# EAGLE board Z_Probing_Add_on_Board (EAGLE 7.2.0)
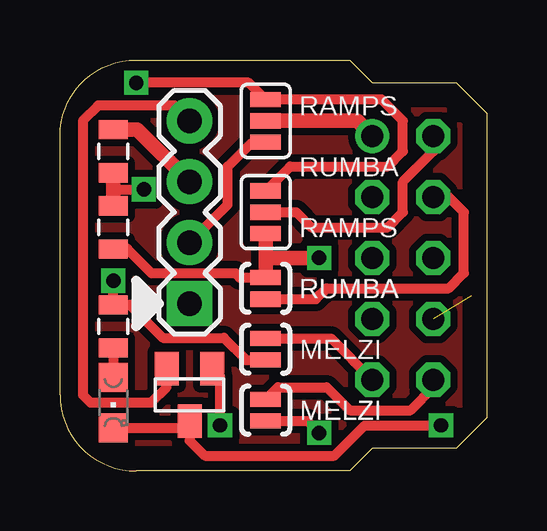
[diagram p0: board, top side]
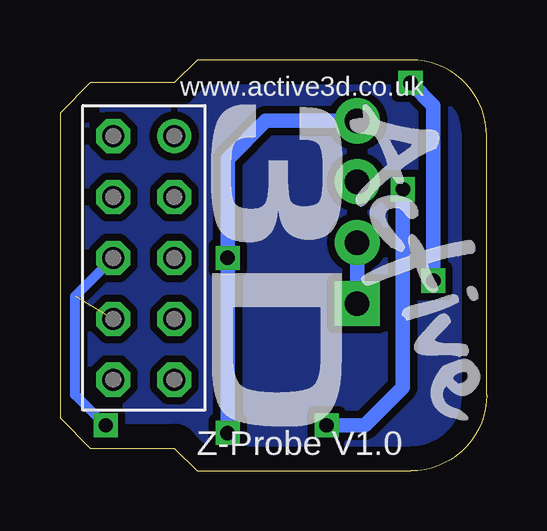
[diagram p1: board, bottom side, seen from below]

Size 17.78 x 17.14 mm. Coordinates in mm from the lower left corner, seen from the top.
Outline: 17.78,14.92 17.78,2.22 16.51,0.95 13.02,0.95 12.07,0 3.18,0 arc-90 0,3.18 0,13.97 arc-90 3.18,17.15 12.07,17.15 13.02,16.19 16.51,16.19 17.78,14.92
Copper layers (1*16): Top 0.035mm / dielectric 1.5mm / Bottom 0.035mm
Design rules "default": minimum track width 10mil, minimum drill 24mil, track to track 8mil, track to pad 8mil, pad to pad 8mil, via to via 8mil, smd to smd 8mil, copper to edge 40mil, drill to drill 8mil, minimum pad ring 10mil, minimum via ring 8mil, stop-mask expansion 4mil, vias tented up to drill 0mil, thermal gap 10mil

## Footprints (pad centres in the part's own frame; a part is rotated, then mirrored left to right if it is on the bottom)
CHIPLED_0805 = smd 1.2 x 1.2: A 0,-1.05; C 0,1.05
SJ_2S-NO = smd 0.635 x 1.27: 1 -0.45,0; 2 0.45,0
SOT23 = smd 1 x 1.4: 1 -0.95,-1.1; 2 0.95,-1.1; 3 0,1.1
0805 = smd 0.8 x 1.2: 1 -0.9,0; 2 0.9,0
1X04 = drill 1.016 pad 1.88 square: 1 0,0 | drill 1.016 pad 1.88: 2 2.54,0; 3 5.08,0; 4 7.62,0
SJ_3 = smd 0.635 x 1.27: 1 -0.889,0; 2 0,0; 3 0.889,0
FE05-2 = drill 0.914: 1 -5.08,1.27 | drill 0.914 octagon: 2 -5.08,-1.27; 3 -2.54,1.27; 4 -2.54,-1.27; 5 0,1.27; 6 0,-1.27; 7 2.54,1.27; 8 2.54,-1.27; 9 5.08,1.27; 10 5.08,-1.27

## Placement (x,y rotation side)
LED1  [CHIPLED_0805]  2.22,2.86 180 top
MELZI_GND  SOLDERJUMPERNO  [SJ_2S-NO]  8.57,2.54 270 top
MELZI_GND1  SOLDERJUMPERNO  [SJ_2S-NO]  8.57,5.08 90 top
Q1  BSS138  [SOT23]  5.4,3.17 180 top
R1  150R  [0805]  2.22,6.03 90 top
R2  10K  [0805]  2.22,10.16 90 top
R3  1K  [0805]  2.22,13.34 90 top
RUMBA_GND  SOLDERJUMPERNO  [SJ_2S-NO]  8.57,7.62 90 top
SENSOR  [1X04]  5.4,6.99 90 top
SJ1  [SJ_3]  8.57,10.79 270 top
SJ2  [SJ_3]  8.57,14.61 270 top
SV1  [FE05-2]  14.29,8.89 270 bottom

## Library data of the parts
LED1 = adafruit
MELZI_GND MELZI_GND1 RUMBA_GND SJ1 SJ2 = SparkFun-Passives
Q1 = SparkFun-DiscreteSemi; PROD_ID: TRANS-08345
R1-R3 = SparkFun-Resistors; PROD_ID: RES-11622
SENSOR = SparkFun-Connectors
SV1 = con-lsta; OC_FARNELL: unknown; OC_NEWARK: unknown

## Nets
2.8V: SENSOR.1 SENSOR.2 SJ2.3
5V: MELZI_GND1.1 R1.2 SJ1.1 SJ2.1
GND: MELZI_GND.2 Q1.2 R2.1 RUMBA_GND.2 SENSOR.4 SJ1.3
N$1: RUMBA_GND.1 SV1.4
N$2: MELZI_GND.1 SV1.10
N$3: SJ1.2 SV1.2
N$4: R3.2 SENSOR.3
N$5: SJ2.2 SV1.1
N$6: Q1.1 R2.2 R3.1
N$7: MELZI_GND1.2 SV1.9
N$10: LED1.A R1.1
SIGNAL: LED1.C Q1.3 SV1.8

## Tracks (layer width: path | path; a pad name or v marks a point on that pad's centre or on a via)
2.8V
  Top 0.406: SENSOR.2 6.99,11.11 6.99,12.7 7.94,13.65 8.51,13.65 SJ2.3
  Bottom 0.61: SENSOR.2 SENSOR.1
5V  (via drill 0.6)
  Top 0.406: MELZI_GND1.1 7.75,4.63 6.83,5.56 4.29,5.56 2.91,6.93 R1.2 v2.22,7.94 | v3.18,16.19 7.87,16.19 SJ2.1 13.4,15.49 14.29,14.61 14.29,13.34 13.65,12.7 9.59,12.7 SJ1.1
  Bottom 0.61: v3.18,16.19 2.22,15.24 v2.22,7.94
GND  (via drill 0.6)
  Top 0.406: 8.39,8.26 RUMBA_GND.2 7.49,8.07 7.3,8.26 3.81,8.26 2.81,9.26 R2.1 | SENSOR.4 4.76,15.24 1.59,15.24 0.95,14.61 0.95,3.18 1.27,2.86 3.81,2.86 4.45,3.49 Q1.2 | MELZI_GND.2 10.29,2.09 v10.8,1.59
  Top 0.61: v10.8,8.89 8.57,8.89 | 8.57,8.89 SJ1.3 | 8.57,8.89 RUMBA_GND.2
  Bottom 0.61: SENSOR.4 9.21,14.61 10.8,13.02 v10.8,8.89 v10.8,1.59
N$1
  Top 0.406: RUMBA_GND.1 10.66,7.17 11.11,7.62 16.19,7.62 16.83,8.26 16.83,10.8 16.19,11.43 SV1.4
N$2
  Top 0.406: MELZI_GND.1 9.08,3.49 11.11,3.49 12.07,2.54 14.61,2.54 15.56,3.49 SV1.10
N$3
  Top 0.406: SJ1.2 9.84,10.8 10.48,10.16 13.65,10.16 14.29,10.8 14.29,12.07 15.56,13.34 SV1.2
N$4
  Top 0.61: R3.2 3.23,14.24 SENSOR.3
N$5
  Top 0.61: SJ2.2 12.38,14.61 SV1.1
N$6  (via drill 0.6)
  Top 0.406: R3.1 2.28,11.75 v3.49,11.75 | v6.67,1.91 6.67,3.96 Q1.1
  Top 0.61: R2.2 R3.1
  Bottom 0.61: v3.49,11.75 3.49,3.49 5.08,1.91 v6.67,1.91
N$7
  Top 0.406: MELZI_GND1.2 11.3,5.53 SV1.9
N$8
  pour Top (isolate 0.305): 12.06,17.14 3.18,17.14 arc90 0,13.97 0,3.17 arc90 3.18,0 12.06,0 13.02,0.95 16.51,0.95 17.78,2.22 17.78,14.92 16.51,16.19 13.02,16.19
N$9
  pour Bottom (isolate 0.305): 12.06,17.14 3.18,17.14 arc90 0,13.97 0,3.17 arc90 3.18,0 12.06,0 13.02,0.95 16.51,0.95 17.78,2.22 17.78,14.92 16.51,16.19 13.02,16.19
N$10
  Top 0.406: R1.1 LED1.A
SIGNAL  (via drill 0.6)  (1 unrouted)
  Top 0.406: 5.4,1.59 5.4,1.27 6.03,0.64 11.43,0.64 12.7,1.91 v15.88,1.91 | 5.4,1.59 Q1.3 | LED1.C 5.18,1.81 5.4,1.59
  Bottom 0.406: v15.88,1.91 17.15,3.18 17.15,7.29 15.55,8.88

## Text on the board
tPlace: RAMPS | RUMBA | RAMPS | RUMBA | RUMBA | MELZI | MELZI | MELZI
bPlace: www.active3d.co.uk | Z-Probe V1.0